# Altium PCB PCB1.PcbDoc (part 2 of 3)
Units mm, origin at the board's own origin, x right, y up, seen from the top; angles counter-clockwise.
Board outline 200 x 55 mm, 4 copper layers (Top Layer, Layer 1, Layer 2, Bottom Layer), stack 1.714 mm thick; 312 components, 230 nets, 1114 pads, 714 vias.
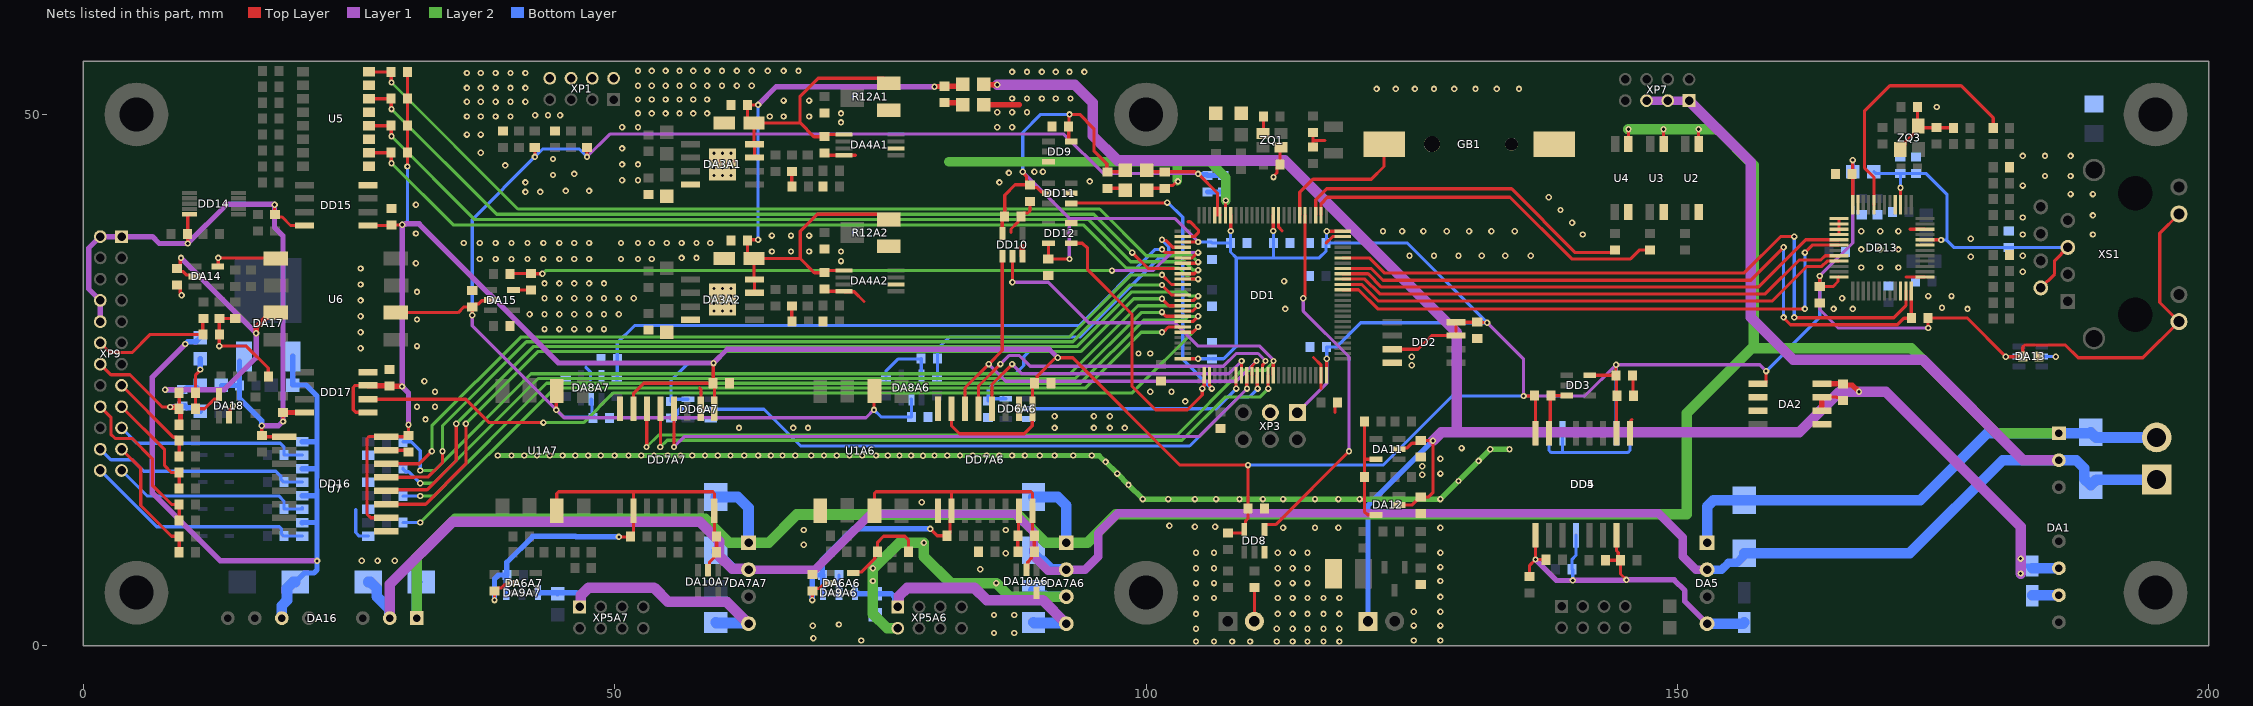
[diagram p4: the nets of this part, all layers, seen from the top]

## Via types
v1: diameter 0.6, hole 0.3, Top Layer to Bottom Layer, tented both sides, 714 vias

## Nets (pads, with @x,y where several pads share a name; then routed paths per layer and width w, separated by ;. In a path a pad name is that pad's centre, name@x,y a point inside that pad or via, vN(x,y) a via of type N, cw(c..) or ccw(c..) an arc to the next point about the centre after c; other vN are vias at no path point) (continued)
+3.3V: C5.1 C6.1 C8.2 C9.2 C10.2 C15.1 C16.1 C22.1 C31.1 C33.1 C34.1 C38A6.1 C38A7.1 C40A6.1 C40A7.1 C56.1 C57.1 C58.1 C59.1 C60.1 C63.1 C68.1 C73.1 C85.1 C86.1 C89.1 DA2.1 DA13.5 DD1.11 DD1.19 DD1.28 DD1.50 DD1.75 DD1.100 DD2.3 DD2.7 DD2.8 DD3.5 DD4.10 DD4.16 DD5.7 DD6A6.5 DD6A7.5 DD7A6.1 DD7A6.7 DD7A7.1 DD7A7.7 DD8.5 DD9.5 DD10.5 DD11.5 DD12.5 DD13.24 DD13.36 DD15.1 DD16.10 DD16.16 DD17.1 DD17.3 L2.1 L5.1 R40.2 R55.2 R76.1 R78.1 R79.1 R80.1 XP3.1 XS1.9 XS1.11 | length 529.1
  Top Layer w0.3: DD17.1@26.8,21.95 26.776,21.974 25.626,21.974 25.4,22.2 25.4,24.3 25.6,24.5 DD17.3@26.8,24.5 DD17.3@26.825,24.475 ; DD15.1@26.8,39.544 28.944,39.544 C85.1@29,39.6 v1@30.005,39.6 ; DD16.16@28.485,19.685 26.876,19.685 26.7,19.509 26.7,12.39 27.04,12.05 DD16.10@28.5,12.05 ; DD16.16@28.5,19.67 30.47,19.67 C86.1@30.6,19.8 v1(30.6,20.8) ; C89.1@28.775,24.475 C89.1@28.8,24.45 ; v1(30.5,45.1) R80.1@30.5,46.4 R78.1@30.5,51.5 R76.1@30.5,54 ; DD7A7.7@51.77,22.3 51.785,22.315 51.785,23.75 52.735,24.7 C40A7.1@59.25,24.7 59.275,24.725 59.275,26.575 v1(59.3,26.6) ; DD7A7.1@59.39,22.3 C40A7.1@59.39,24.54 ; DD7A6.7@81.701,22.3 81.701,20.699 82.45,19.95 88.55,19.95 89.3,20.7 89.3,22.329 89.321,22.35 89.321,24.521 C40A6.1@89.5,24.7 ; DD10.5@86.481,38.802 86.481,40.213 C58.1@86.668,40.4 86.7,40.432 86.7,42.4 87.675,43.375 C59.1@89.025,43.375 ; v1(88.4,44.6) 88.4,44.519 88.75,44.169 88.75,43.65 C59.1@89.025,43.375 ; C40A6.1@89.55,24.8 89.766,25.016 89.766,25.371 91.438,27.043 91.643,27.043 v1(91.7,27.1) 93.1,27.1 103.2,17 v1(109.6,17) C56.1@109.6,12.9 109.6,11.975 109.375,11.75 109.375,11.075 DD8.5@109.25,10.95 109.25,10.725 109.125,10.6 R40.2@107.7,10.6 ; C60.1@90.8,36.4 C60.1@90.824,36.4 ; C60.1@90.824,36.374 C60.1@90.824,36.4 ; DD12.5@90.824,37.883 C60.1@90.824,36.4 ; DD11.5@90.825,42.578 90.7,42.703 90.15,42.703 89.745,43.108 89.342,43.108 C59.1@89.075,43.375 C59.1@89.025,43.375 ; C57.1@92.725,48.925 C57.1@92.725,48.875 ; v1(92.8,36.4) C60.1@90.824,36.4 ; DD9.5@92.975,47.45 92.85,47.45 92.725,47.575 C57.1@92.725,48.875 ; L2.1@98.065,44.75 97.915,44.6 C5.1@96.365,44.6 96.315,44.6 96.315,45.362 95.1,46.577 95.1,48.669 93.769,50 v1(92.8,50) 92.762,49.962 92.762,48.913 C57.1@92.725,48.875 ; DD1.50@103.45,27 v1(104.9,27) ; DD1.28@103.45,38 v1(104.9,38) ; v1(107.975,39.025) DD1.19@107.975,40.525 ; v1(111.975,39.025) DD1.11@111.975,40.525 ; DD1.75@116.975,25.475 116.975,26.975 v1(117,27) ; v1(117,39) DD1.100@118.5,39 ; DD2.3@123.171,27.896 125.596,27.896 126.896,29.196 DD2.7@129.171,29.196 DD2.8@129.171,30.446 C22.1@131.171,30.446 131.193,30.423 132.077,30.423 v1(132.1,30.4) ; v1(135.533,23.5) 136.5,23.5 C31.1@136.55,23.55 136.65,23.45 DD4.16@136.65,20.01 ; DD3.5@141.75,25.45 C34.1@144.235,25.45 ; v1(144.24,26.445) 144.237,26.442 144.237,25.448 144.272,25.413 144.272,23.564 C33.1@144.308,23.527 144.27,23.489 DD4.10@144.27,20.01 ; DA2.1@157.6,24.65 158.2,24.65 158.35,24.8 v1(158.35,25.85) ; v1(163.4,34.8) C73.1@163.4,33.8 164.644,33.8 165.12,34.276 165.12,34.7 DD13.36@165.2,34.7 ; DD13.24@166.5,41.5 166.5,44.35 C68.1@166.45,44.4 166.475,44.425 166.475,45.675 v1(166.5,45.7) ; v1(173.6,29.9) 173.585,29.915 173.585,30.835 R55.2@173.57,30.85 177.25,30.85 v1(180.9,27.2) 182.475,27.2 C63.1@182.5,27.225 182.5,28.124 182.676,28.3 186.512,28.3 187.712,27.1 193.8,27.1 XS1.9@197.2,30.5 195.4,32.3 195.4,38.83 XS1.11@197.2,40.63
  Top Layer w0.5: DD17.3@26.825,24.475 C89.1@28.775,24.475 ; C89.1@28.825,24.425 28.831,24.419 29.981,24.419 v1(30,24.4)
  Layer 1 w0.3: v1(88.4,44.6) 92.787,40.213 ; v1@92.787,36.413 92.787,40.213 ; v1(104.9,38) 102.687,40.213 92.787,40.213 ; XP3.1@114.24,21.94 117,24.7 v1(117,27) ; v1(132.1,30.4) 135.533,26.967 v1(135.533,23.5) 141.295,23.5 v1(144.24,26.445) 157.755,26.445 v1(158.35,25.85) ; v1(166.5,45.7) 166.5,37.9 v1(163.4,34.8) 163.4,31.644 165.144,29.9 v1(173.6,29.9)
  Layer 1 w0.5: v1(30.6,20.8) 30.6,23.8 v1(30,24.4) 30.009,24.409 30.009,39.631 30.048,39.67 30.287,39.67 30.317,39.7 31.6,39.7 44.7,26.6 v1(59.3,26.6) 60.6,27.9 90.9,27.9 v1(91.7,27.1)
  Bottom Layer w0.3: v1(30.017,39.612) 30.099,39.612 30.249,39.762 30.324,39.762 30.5,39.938 v1(30.5,45.1) ; C38A7.1@55.3,23 55.3,24.976 56.924,26.6 v1(59.3,26.6) ; C38A7.1@55.5,23.2 DD6A7.5@56.9,23.2 ; DD6A6.5@86.547,23.373 DD6A6.5@86.672,23.248 ; DD6A6.5@86.801,23.248 DD6A6.5@86.672,23.248 ; v1(88.4,44.6) 88.4,48.3 90.1,50 v1(92.8,50) ; v1(91.7,27.1) 90.9,27.9 89.2,27.9 88.5,27.2 88.5,26.371 87.741,25.612 86.642,25.612 85.151,24.121 C38A6.1@85.151,23.048 85.273,23.171 85.291,23.171 85.369,23.248 DD6A6.5@86.672,23.248 ; v1(104.9,27) C10.2@106,27 ; v1(104.9,38) 106.1,38 C9.2@106.2,37.9 C6.1@107.95,37.9 ; C10.2@106.2,27 107.3,27 108.5,28.2 108.5,36.5 ; v1(107.975,39.025) 107.962,39.013 107.962,37.912 C6.1@107.95,37.9 ; v1(109.6,17) 122.3,17 128.8,23.5 v1(135.533,23.5) ; v1(111.975,39.025) 111.987,39.013 C8.2@111.987,37.837 ; C8.2@112,37.9 112,36.5 ; v1(117,27) C16.1@117,28.1 117.895,28.1 120.195,30.4 v1(132.1,30.4) 124.6,37.9 C15.1@116.95,37.9 ; v1(117,39) 116.975,38.975 116.975,37.925 C15.1@116.95,37.9 ; v1(144.24,26.445) 144.255,26.429 144.255,20.025 DD5.7@144.27,20.01 ; v1(158.35,25.85) 163.4,30.9 v1(163.4,34.8) ; L5.1@166.5,44.6 v1(166.5,45.7) ; v1(180.9,27.2) 180.912,27.212 182.137,27.212 DA13.5@182.15,27.225 ; C6.1@107.95,37.9 107.95,37.05 108.5,36.5 ; 108.5,36.5 112,36.5 ; 112,36.5 116.3,36.5 116.95,37.15 C15.1@116.95,37.9
+3.3VA: C7.2 C11.1 C13.2 C47A6.1 C47A7.1 C87.1 DA8A6.2 DA8A7.2 DA15.2 DD1.21 DD1.22 L2.2 R15A3.1 R15A4.1 U1A6.6 U1A7.6 U6.6 | length 165.3
  Top Layer w0.3: U6.6@29.399,31.35 35.271,31.35 35.8,31.879 C87.1@36.6,31.879 ; v1(36.6,31.1) C87.1@36.6,31.879 ; DA15.2@38.324,32.529 38.26,32.465 37.477,32.465 37.166,32.154 36.875,32.154 C87.1@36.6,31.879 ; R15A4.1@42.485,46.875 42.5,46.86 v1(42.5,46) ; v1(44.5,22.2) 44.5,23.925 U1A7.6@44.55,23.975 ; R15A3.1@47.385,46.875 47.4,46.86 v1(47.4,46) ; v1(74.4,22.2) 74.4,23.934 U1A6.6@74.441,23.975 ; L2.2@100.065,44.75 100.215,44.6 C11.1@101.765,44.6 104.619,44.6 104.819,44.4 v1(104.9,44.4) 106.725,42.575 106.725,40.525 ; DD1.22@106.475,40.525 106.725,40.525 ; DD1.21@106.975,40.525 106.725,40.525
  Layer 1 w0.3: v1(36.6,31.1) 36.6,30.1 45.25,21.45 73.65,21.45 v1(74.4,22.2) ; v1(47.4,46) 49.55,48.15 92.271,48.15 95.969,44.452 104.848,44.452 v1(104.9,44.4)
  Bottom Layer w0.3: v1(36.6,31.1) 36.6,40.1 v1(42.5,46) 43.258,46.758 46.642,46.758 v1(47.4,46) ; v1(44.5,22.2) 45.2,21.5 48.125,21.5 C47A7.1@48.079,21.555 ; DA8A7.2@47.8,22.75 DA8A7.2@47.8,23.195 ; DA8A7.2@47.8,23.2 47.877,23.123 47.877,21.527 C47A7.1@47.954,21.45 ; v1(74.4,22.2) 75.069,21.531 77.923,21.531 77.923,23.22 DA8A6.2@77.918,23.225
  Bottom Layer w0.5: v1(104.9,44.4) 104.957,44.343 105.707,44.343 C13.2@105.8,44.25 105.804,44.254 107.262,44.254 C7.2@107.266,44.258
+3.3VA_ETH: C61.1 C72.1 C75.1 DD13.8 DD13.15 L5.2 XS1.2 XS1.5 | length 33.6
  Top Layer w0.3: DD13.15@171,41.5 v1(171,43.1) ; DD13.8@173.3,38.2 174.797,38.2 v1(174.816,38.182) ; XS1.2@184.2,33.677 185.5,34.977 185.5,36.247 XS1.5@186.74,37.487
  Bottom Layer w0.3: L5.2@168.5,44.6 168.65,44.45 C72.1@170.975,44.45 ; v1(171,43.1) 171,44.425 C72.1@170.975,44.45 ; v1(174.816,38.182) 175.382,38.182 ; XS1.5@186.74,37.487 C61.1@181.179,37.487 176.013,37.487 175.382,38.118 175.382,42.433 173.365,44.45 C75.1@172.442,44.45 C72.1@170.975,44.45
+5V: C2.1 C4.1 C52.1 C53.1 DA1.6 DA2.8 DA11.2 DA12.2 L1.1 XP6.1 | length 173.1
  Top Layer w0.3: L1.1@84.735,52.85 L1.1@84.785,52.8 ; DA11.2@123.8,18.5 123.921,18.621 124.59,18.621 125.019,19.05 125.575,19.05 C52.1@125.85,19.325 125.863,19.312 126.988,19.312 v1(127,19.3) 127,14.4 126.607,14.007 C53.1@125.85,14.007 125.8,14.007 125.05,13.257 124.121,13.257 123.996,13.382 DA12.2@123.871,13.257
  Top Layer w0.5: L1.1@84.785,52.8 v1(86,52.8) ; DA2.8@163.235,24.65 DA2.8@163.6,24.65 C4.1@165.6,24.65 165.709,24.541 166.452,24.541 v1@167.074,23.919
  Layer 1 w1: v1(86,52.8) 93.3,52.8 95,51.1 95,48 97.342,45.658 113.042,45.658 129.225,29.475 129.225,20.1 ; v1(127,19.3) 127.8,20.1 129.225,20.1 ; v1(182.3,6.8) v1(182.3,8.2) 182.3,11.2 169.6,23.9 v1(167.093,23.9) 165.265,23.9 161.465,20.1 129.225,20.1
  Bottom Layer w0.5: XP6.1@120.896,2.3 120.896,13.196 v1(127,19.3) ; v1(182.3,6.8) 182.3,7.5 ; v1(182.3,8.2) 182.3,7.5 ; C2.1@183.4,7.5 182.3,7.5
  Bottom Layer w1: C2.1@183.4,7.3 DA1.6@185.9,7.3
+5V_DRVA6: C41A6.1 C44A6.1 C48A6.1 C49A6.1 DA6A6.2 DA9A6.1 DA10A6.2 DD7A6.10 DD7A6.16 R25A6.2 U1A6.3 | length 50.9
  Top Layer w0.3: v1(68.6,4.3) C41A6.1@68.6,5.15 68.854,5.404 69.282,5.404 69.653,5.775 70.175,5.775 DA6A6.2@70.3,5.9 ; U1A6.3@74.441,12.75 74.441,14.324 74.616,14.5 81.701,14.5 ; v1(79.7,11) 80.35,10.35 R25A6.2@81.291,10.35 81.551,10.61 81.551,12.6 81.701,12.75 81.701,14.5 ; DA10A6.2@88.741,7.15 88.866,7.275 88.866,7.875 89.216,8.225 89.216,8.575 C48A6.1@89.491,8.85 C44A6.1@89.491,10.35 89.321,10.52 89.321,12.75 89.326,12.755 89.326,14.324 89.151,14.5 81.701,14.5
  Bottom Layer w0.5: v1(68.6,4.3) 68.6,6.491 68.776,6.667 C49A6.1@69.55,6.667 ; DA9A6.1@69.6,5 69.575,5.025 69.575,6.642 C49A6.1@69.55,6.667 ; v1(79.7,11) 72.441,11 69.55,8.109 C49A6.1@69.55,6.667
+5V_DRVA7: C41A7.1 C44A7.1 C48A7.1 C49A7.1 DA6A7.2 DA9A7.1 DA10A7.2 DD7A7.10 DD7A7.16 R25A7.2 U1A7.3 | length 50.3
  Top Layer w0.3: v1(38.7,4.3) C41A7.1@38.7,5.15 38.975,5.425 39.34,5.425 39.69,5.775 40.291,5.775 DA6A7.2@40.416,5.9 ; U1A7.3@44.55,12.7 44.55,14.324 44.726,14.5 51.77,14.5 ; v1(50.4,10.25) 51.45,10.25 51.77,10.57 DD7A7.10@51.77,12.7 51.77,14.5 ; DA10A7.2@58.8,7.1 58.925,7.225 58.925,7.863 59.325,8.263 59.325,8.525 C48A7.1@59.6,8.8 C44A7.1@59.6,10.3 59.4,10.5 59.4,14.324 59.224,14.5 51.77,14.5
  Bottom Layer w0.5: v1(38.7,4.3) 38.7,6.3 39.067,6.667 C49A7.1@39.858,6.667 ; DA9A7.1@39.8,5 39.8,6.609 C49A7.1@39.858,6.667 ; v1(50.4,10.25) 46.361,10.25 46.311,10.3 42.3,10.3 39.858,7.858 C49A7.1@39.858,6.667
+5V_HW: C78.1 C83.1 C84.1 C92.1 C94.1 DA17.3 DD14.10 DD15.8 DD16.1 DD17.8 L7.1 XP9.1 XP9.2 XP9.8 XP9.10 | length 71.1
  Top Layer w0.3: v1(9.825,37.85) C78.1@9.825,38.75 9.825,40.55 DD14.10@10.025,40.55 ; C84.1@16.8,19.8 v1(16.8,20.7) ; C84.1@17.1,19.695 17.125,19.67 DD16.1@18.8,19.67 ; v1(18,41.5) 18,40.625 C83.1@18.025,40.6 18.281,40.344 18.705,40.344 19.499,39.55 DD15.8@20.8,39.55 ; v1(18.8,21.1) C92.1@18.8,21.95
  Top Layer w0.5: C92.1@18.8,21.95 DD17.8@20.8,21.95
  Layer 1 w0.5: XP9.10@1.6,30.5 XP9.8@1.6,32.5 0.518,33.582 0.518,37.418 XP9.2@1.6,38.5 XP9.1@3.6,38.5 6.5,38.5 7.15,37.85 v1(9.825,37.85) 13.525,41.55 17.95,41.55 v1(18,41.5) 18,39.375 18.8,38.575 v1(18.8,21.1) 18.773,21.1 18.373,20.7 v1(16.8,20.7)
  Bottom Layer w0.5: L7.1@13,24.5 C94.1@14.7,24.5 ; DA17.3@14.7,26.804 C94.1@14.7,24.5 ; v1@16.767,20.733 16.781,20.746 16.781,21.194 14.7,23.275 C94.1@14.7,24.5
+5V_PS: C35.1 C36.1 C37.1 DA5.4 DD4.1 DD4.7 DD5.13 R17.1 R19.1 R20.1 | length 38.4
  Top Layer w0.3: R19.1@136.1,6.5 136.1,7.568 v1(136.65,8.118) ; DD4.1@136.65,10.41 v1(136.65,8.118) ; R17.1@137.64,8.098 137.62,8.118 v1(136.65,8.118) ; R20.1@143.247,8.05 C35.1@144.65,8.05 ; DD4.7@144.27,10.41 144.27,8.932 144.433,8.769 144.433,8.267 C35.1@144.65,8.05 ; v1(145.2,6.2) 144.65,6.75 C35.1@144.65,8.05
  Layer 1 w0.5: v1(136.65,8.118) 138.618,6.15 v1(140.15,6.15) 140.175,6.175 145.175,6.175 v1(145.2,6.2) 149.7,6.2 150.7,5.2 150.7,4.18 DA5.4@152.8,2.08
  Bottom Layer w0.3: v1(140.15,6.15) 140.15,7.15 C36.1@140.1,7.2 140.1,8.15 140.46,8.51 DD5.13@140.46,10.41
  Bottom Layer w1: DA5.4@152.8,2.08 156.18,2.08 C37.1@156.3,2.2
+5VA: C3.1 C25A1.1 C25A2.1 C26A1.1 C26A2.1 C29A1.1 C29A2.1 DA3A1.7 DA3A1.8 DA3A2.7 DA3A2.8 DA4A1.1 DA4A2.1 L1.2 R12A1.3 R12A2.3 | length 87.1
  Top Layer w0.3: DA3A2.7@63.149,33.216 DA3A2.8@63.149,34.466 63.124,34.491 C26A2.1@63.124,36.441 ; DA3A1.7@63.15,45.95 DA3A1.8@63.15,47.2 63.125,47.225 C26A1.1@63.125,49.2 ; v1(63.5,38.2) 62.546,38.2 C25A2.1@62.499,38.153 62.499,36.891 62.949,36.441 C26A2.1@63.124,36.441 ; v1(63.5,50.9) C25A1.1@62.5,50.9 62.5,49.65 62.95,49.2 C26A1.1@63.125,49.2 ; C29A2.1@69.749,35.103 68.799,35.103 67.461,36.441 ; C29A1.1@69.75,47.85 70,48.1 DA4A1.1@71.574,48.1 ; C29A1.1@69.75,47.9 68.75,47.9 67.45,49.2 ; C29A2.1@69.772,35.08 69.998,35.306 DA4A2.1@71.573,35.306 ; R12A2.3@75.797,40.125 75.322,40.6 69.047,40.6 67.461,39.014 67.461,36.441 ; R12A1.3@75.797,52.925 75.322,53.4 69.147,53.4 67.45,51.703 67.45,49.2 ; v1(80.1,52.6) v1@80.125,52.625 ; C3.1@81.01,52.625 C3.1@81.035,52.65 ; L1.2@82.535,52.65 L1.2@82.735,52.85 ; C26A2.1@63.124,36.441 67.461,36.441 ; C26A1.1@63.125,49.2 67.45,49.2
  Top Layer w0.5: v1@80.125,52.625 C3.1@81.01,52.625 ; C3.1@81.035,52.65 L1.2@82.535,52.65
  Layer 1 w0.5: v1(63.5,50.9) 65.2,52.6 v1(80.1,52.6)
  Bottom Layer w0.3: v1(63.5,38.2) v1(63.5,50.9)
+5VA_HW: C80.1 C98.1 DA14.2 L7.2 U6.3 | length 31.5
  Top Layer w0.3: v1(9.2,36.5) 9.2,36.419 9.125,36.344 9.125,35.775 8.85,35.5 C80.1@8.8,35.5 9.075,35.225 9.377,35.225 9.727,34.875 10.377,34.875 DA14.2@10.502,34.75
  Top Layer w0.5: v1(16.267,29.41) 16.286,29.429 16.286,30.012 17.224,30.95 17.724,30.95 U6.3@18.124,31.35
  Layer 1 w0.5: v1(7.7,24.1) 13.262,24.1 16.267,27.105 16.267,29.422 9.2,36.488 v1(9.2,36.5)
  Bottom Layer w0.5: v1(7.7,24.1) 7.703,24.097 9.312,24.097 C98.1@9.315,24.095 ; C98.1@9.399,23.92 9.773,24.294 10.68,24.294 L7.2@10.784,24.19
+12V_DRVA6: C43A6.1 C45A6.2 DA7A6.4 DA9A6.3 XP5A6.1 | length 26.7
  Layer 1 w1: XP5A6.1@76.641,3.65 76.741,3.75 76.741,4.658 77.523,5.441 83.859,5.441 85,4.3 90.28,4.3 DA7A6.4@92.5,2.08
  Bottom Layer w0.5: DA9A6.3@72.6,5 72.6,4.943 72.635,4.908 C45A6.2@74.5,4.908 ; C45A6.2@74.508,4.9 76.045,4.9 76.337,4.607 76.337,3.953 XP5A6.1@76.641,3.65
  Bottom Layer w1: C43A6.1@89.41,2.2 89.47,2.14 92.44,2.14 DA7A6.4@92.5,2.08
+12V_DRVA7: C43A7.1 C45A7.2 DA7A7.4 DA9A7.3 XP5A7.1 | length 26.9
  Layer 1 w1: XP5A7.1@46.7,3.65 46.8,3.75 46.8,4.725 47.552,5.477 53.697,5.477 55.024,4.15 60.53,4.15 DA7A7.4@62.6,2.08
  Bottom Layer w0.5: DA9A7.3@42.8,5 44.525,5 C45A7.2@44.625,4.9 ; C45A7.2@44.625,5 46.407,5 46.7,4.707 XP5A7.1@46.7,3.65
  Bottom Layer w1: C43A7.1@59.5,2.2 59.56,2.14 62.54,2.14 DA7A7.4@62.6,2.08
+24V: C1.1 C32.1 C39A6.1 C39A7.1 C90.1 DA1.2 DA5.2 DA7A6.2 DA7A7.2 DA16.2 XP2.1 XP7.1 XP7.3 XP7.5 | length 266.9
  Layer 1 w0.8: DA7A7.2@62.6,7.16 68.86,7.16 74.129,12.429 87.689,12.429 89.458,10.659 89.458,8.377 90.757,7.079 92.419,7.079 DA7A6.2@92.5,7.16 94.26,7.16 95.5,8.4 95.5,10.6 97.37,12.47 148.23,12.47 150.5,10.2 150.5,8.4 151.726,7.174 152.786,7.174 DA5.2@152.8,7.16 ; XP7.5@147.1,51.3 XP7.3@149.1,51.3 XP7.1@151.1,51.3
  Layer 1 w1: DA16.2@28.84,2.6 28.84,5.784 34.741,11.685 58,11.685 59.85,9.835 59.85,8.45 61.063,7.237 62.523,7.237 DA7A7.2@62.6,7.16 ; XP7.1@151.1,51.3 156.9,45.5 156.9,30.9 160.9,26.9 173.109,26.9 182.549,17.46 DA1.2@185.9,17.46
  Bottom Layer w0.8: C39A7.1@59.5,9 59.5,8.8 60.2,8.1 60.4,8.1 61.225,7.275 62.485,7.275 DA7A7.2@62.6,7.16 ; C39A6.1@89.41,9 89.41,8.8 90.11,8.1 90.31,8.1 91.136,7.275 92.385,7.275 DA7A6.2@92.5,7.16 ; DA5.2@152.8,7.16 154.16,7.16 154.8,7.8 155.6,7.8 156.3,8.5 C32.1@156.3,8.7
  Bottom Layer w1: C90.1@26.8,6 27,6 27.6,5.4 27.6,4.642 28.783,3.459 28.783,2.657 DA16.2@28.84,2.6 ; C32.1@156.3,8.7 171.85,8.7 180.61,17.46 187.54,17.46 188.3,16.7 188.3,15.7 C1.1@188.9,15.1 189.44,15.64 XP2.1@195.1,15.64
+24V_HW: C91.2 C93.1 DA16.6 DA17.1 L6.1 U7.10 U7.12 U7.14 U7.16 | length 69.1
  Layer 1 w0.5: v1(9.6,28.4) 6.5,25.3 6.5,14.391 12.903,7.988 v1(22,7.988)
  Bottom Layer w0.5: v1(9.6,28.4) 9.627,28.4 9.842,28.615 10.621,28.615 L6.1@11.006,29 ; DA17.1@19.7,27.229 C91.2@19.7,24.535 20.956,24.535 22,23.492 22,19.21 ; C93.1@19.959,6 20.804,6.845 21.707,6.845 22,7.138 v1(22,7.988) 22,11.595 ; U7.10@20.6,11.59 20.605,11.595 22,11.595 ; U7.12@20.6,14.13 21.994,14.13 22,14.124 ; U7.14@20.6,16.67 21.921,16.67 22,16.591 ; U7.16@20.6,19.21 22,19.21 ; 22,11.595 22,14.124 ; 22,14.124 22,16.591 ; 22,16.591 22,19.21
  Bottom Layer w1: DA16.6@18.68,2.6 18.68,3.78 19.169,4.269 19.169,5.4 19.769,6 C93.1@19.959,6
+24VA_HW: C96.1 C97.1 DA18.5 L6.2 | length 7.9
  Top Layer w0.3: C97.1@10.574,23.807 10.574,25.493 11,25.919 v1(11,26) ; C97.1@10.574,23.864 C96.1@10.575,22.3 C96.1@10.575,22.3 11.408,22.3 12.308,23.2 12.633,23.2 12.758,23.325 DA18.5@12.758,23.65
  Bottom Layer w0.5: v1(11,26) 11.003,26.003 11.003,26.997 L6.2@11.006,27
+VBAT: DD1.6 GB1.2 | length 13.2
  Top Layer w0.3: DD1.6@114.475,40.525 114.475,42.675 115.7,43.9 121.2,43.9 122.4,45.1 GB1.2@122.4,47.2
ACTn: DD13.20 R47.2 | length 24.5
  Top Layer w0.3: DD13.20@168.5,41.5 168.5,44.1 167.6,45 167.6,50.3 170,52.7 176.7,52.7 179.725,49.675 R47.2@179.725,48.712
AGND: C3.2 C7.1 C11.2 C13.1 C23A1.1 C23A2.1 C25A1.2 C25A2.2 C26A1.2 C26A2.2 C27A1.2 C27A2.2 C28A1.2 C28A2.2 C29A1.2 C29A2.2 C30A3.2 C30A4.2 C47A6.2 C47A7.2 C50A6.2 C50A7.2 C87.2 C88.2 DA3A1.4 DA3A1.EPAD DA3A2.4 DA3A2.EPAD DA4A1.4 DA4A1.6 DA4A2.4 DA4A2.6 DA8A6.5 DA8A7.5 DA15.5 DD1.20 R1.2 R2.2 R7A1.2 R7A2.2 R11A1.1 R11A2.1 R12A1.1 R12A2.1 R13A1.2 R13A2.2 R27A6.2 R27A7.2 R81.2 XP1.2 XP1.4 XP1.6 XP1.8 | length 58.8
  Top Layer w0.3: DA15.5@40.474,33.479 C88.2@42.124,33.479 ; R13A2.2@66.673,30.531 C27A2.2@66.673,31.981 ; R13A1.2@66.674,43.2 C27A1.2@66.674,44.65 ; C29A2.2@69.673,33.431 69.748,33.356 DA4A2.4@71.573,33.356 71.623,33.306 72.551,33.306 73.462,32.394 ; C29A1.2@69.75,46.3 69.9,46.15 DA4A1.4@71.574,46.15 72.65,46.15 ; R1.2@82.535,51.1 R1.2@82.735,50.9 ; R2.2@100.065,42.85 100.265,43.05 C11.2@101.765,43.05 102.04,43.325 102.544,43.325 102.919,43.7 v1(103,43.7) ; DD1.20@107.475,40.525 107.475,41.875 v1(107.5,41.9)
  Top Layer w0.5: C3.2@81.035,51.1 R1.2@82.535,51.1
  Layer 2 w0.9: 81.443,45.535 102.961,45.535 ; v1@102.961,43.739 102.961,45.535 ; v1(107.5,41.9) 107.5,44.09 106.054,45.535 102.961,45.535
  Bottom Layer w0.3: 47.3,26.2 47.72,25.78 47.72,25 ; R27A6.2@75.527,25.076 75.527,25.847 76.657,26.976 78.777,26.976 C50A6.2@78.827,27.026 78.848,27.006 78.848,25.395 DA8A6.5@78.868,25.375
  Bottom Layer w0.5: C13.1@105.8,42.7 105.804,42.704 107.262,42.704 C7.1@107.266,42.708 107.306,42.708 107.481,42.533 107.481,41.918 v1@107.499,41.9
  other v1: 43.4,29.8 44.8,29.8 46.2,29.8 47.6,29.8 49,29.8 42,31.2 43.4,31.2 44.8,31.2 46.2,31.2 47.6,31.2 49,31.2 50.4,31.2 59.349,31.516 60.149,31.516 60.949,31.516 59.349,32.216 60.149,32.216 60.949,32.216 43.4,32.7 44.8,32.7 46.2,32.7 47.6,32.7 49,32.7 50.4,32.7 51.8,32.7 59.349,32.916 60.149,32.916 60.949,32.916 59.349,33.616 60.149,33.616 60.949,33.616 43.4,34.1 44.8,34.1 46.2,34.1 47.6,34.1 49,34.1 71.3,36.2 37.3,36.4 38.8,36.4 40.3,36.4 41.8,36.4 43.3,36.4 44.8,36.4 46.2,36.4 47.6,36.4 50.6,36.4 52.2,36.4 53.5,36.4 56.3,36.5 57.7,36.5 64.8,37.1 66.6,37.1 68.3,37.1 71.3,37.1 35.8,37.9 37.3,37.9 38.8,37.9 40.3,37.9 41.8,37.9 43.3,37.9 44.8,37.9 46.2,37.9 47.6,37.9 50.6,37.9 52.2,37.9 53.5,37.9 54.9,37.9 56.3,37.9 57.7,37.9 59,37.9 64.8,38.6 66.6,38.6 68.3,38.6 41.6,42.714 43,42.714 45.4,42.8 47.6,42.8 41.6,43.6 50.7,43.8 52.2,43.8 59.35,44.25 60.15,44.25 60.95,44.25 44.2,44.3 46.2,44.4 59.35,44.95 60.15,44.95 60.95,44.95 39.7,45.2 50.7,45.3 52.2,45.3 59.35,45.65 60.15,45.65 60.95,45.65 44.2,45.8 59.35,46.35 60.15,46.35 60.95,46.35 37.4,46.4 50.7,46.8 36.1,48.1 37.4,48.1 50.7,48.8 52.2,48.8 71.3,49.25 36.1,49.8 37.4,49.8 38.8,49.8 40.2,49.8 64.6,49.8 65.9,49.8 68.3,49.8 42.52,49.925 43.729,49.925 44.873,49.925 52.2,50.1 53.5,50.1 54.8,50.1 56.1,50.1 57.4,50.1 58.7,50.1 71.3,50.1 36.1,51.2 37.4,51.2 38.8,51.2 40.2,51.2 41.6,51.2 65.9,51.3 68.3,51.3 52.2,51.4 53.5,51.4 54.8,51.4 56.1,51.4 57.4,51.4 58.7,51.4 36.1,52.5 37.4,52.5 38.8,52.5 40.2,52.5 41.6,52.5 52.2,52.7 53.5,52.7 54.8,52.7 56.1,52.7 57.4,52.7 58.7,52.7 60.1,52.7 61.5,52.7 62.9,52.7 36.1,53.9 37.4,53.9 38.8,53.9 40.2,53.9 41.6,53.9 52.2,54.1 53.5,54.1 54.8,54.1 56.1,54.1 57.4,54.1 58.7,54.1 60.1,54.1 61.5,54.1 62.9,54.1 64.4,54.1 65.9,54.1 67.3,54.1
AGND_HW: C80.2 C95.2 C96.2 C97.2 C98.2 DA14.5 DA18.2 R58.2 R65.2 R77.2 R88.2 R89.1 U6.1 XP9.14 | length 34.2
  Top Layer w0.3: XP9.14@1.6,26.5 2.6,25.5 4.4,25.5 7.432,22.468 v1(8.189,22.468) ; C80.2@8.8,33.95 8.85,33.95 9.125,33.675 9.125,33.196 9.25,33.071 v1(9.25,32.99) ; C97.2@9.023,23.865 9.024,23.864 C96.2@9.025,22.3 C96.2@9.025,22.3 ; DA14.5@12.652,35.7 12.7,35.748 v1(12.7,36.5) 18.074,36.5 U6.1@18.124,36.45 ; R58.2@12.8,29.3 v1(12.8,28.2) 15.349,28.2 17.408,26.141 R89.1@17.408,25.345 ; R58.2@12.8,29.525 R65.2@12.8,30.8 R77.2@14.3,30.8 ; DA18.2@13.708,21.5 13.833,21.625 13.833,22.251 14.085,22.503 v1(14.085,22.584)
  Top Layer w0.5: v1(8.189,22.468) 8.208,22.449 9.051,22.449 C96.2@9.106,22.394 ; C95.2@8.998,20.802 C95.2@9,20.8 ; C96.2@9.15,22.3 9.152,22.298 C95.2@9.152,20.79
  Bottom Layer w0.5: v1(8.189,22.468) 8.216,22.468 8.261,22.513 9.09,22.513 9.169,22.591 9.576,22.591 9.773,22.394 10.656,22.394 R88.2@11,22.05
AN_MOD_HW: R58.1 R61.1 XP9.12 | length 12.2
  Top Layer w0.3: XP9.12@1.6,28.5 2.5,27.6 3.973,27.6 4.6,27.6 6.3,29.3 R58.1@11.25,29.3 11.25,30.75 R61.1@11.3,30.8
COM1_HW: R60.2 R67.1 XP9.17 | length 10.4
  Top Layer w0.3: XP9.17@3.6,22.5 7.648,18.452 7.648,16.952 8.3,16.3 R60.2@9.025,16.3 R67.1@9.025,14.8
COM2_HW: R63.2 R74.1 XP9.18 | length 15.1
  Top Layer w0.3: XP9.18@1.6,22.5 2.6,21.5 2.6,19.9 3,19.5 4.6,19.5 6.5,17.6 6.5,15.1 8.3,13.3 R63.2@9.025,13.3 R74.1@9.025,11.8
COM3_HW: R66.2 R68.1 XP9.21 | length 12.4
  Top Layer w0.3: XP9.21@3.6,18.5 5.4,16.7 5.4,13.2 8.3,10.3 R66.2@9.025,10.3 9.025,10.152 R68.1@9.025,8.8
CRASH_IND: DD1.3 R38.2 | length 32.6
  Top Layer w0.3: DD1.3@115.975,40.525 115.975,41.975 117,43 134.4,43 140.4,37 143.875,37 R38.2@144.125,37.25
D_VALUE: DD1.52 DD12.1 | length 26.5
  Top Layer w0.3: DD12.1@92.974,37.883 94.017,37.883 94.5,37.4 94.5,35.4 98.686,31.214 98.686,24.414 100.891,22.209 103.909,22.209 105.3,23.6 105.3,24.281 105.475,24.456 DD1.52@105.475,25.475
  other v1: 105.3,24.2
DIG_MOD_HW: R57.2 R73.1 XP9.15 | length 9.1
  Top Layer w0.3: XP9.15@3.6,24.5 8.475,19.625 8.75,19.625 9.025,19.35 R57.2@9.025,19.3 R73.1@9.025,17.8
DRV1_ADC: C50A6.1 DD1.29 R28A6.2 | length 32.2
  Top Layer w0.3: v1(101.5,38.2) 101.557,38.143 101.857,38.143 102.5,37.5 DD1.29@103.45,37.5
  Bottom Layer w0.3: R28A6.2@80.327,25.076 R28A6.2@80.377,25.126 ; R28A6.2@80.377,25.131 C50A6.1@80.377,27.031 ; C50A6.1@80.377,27.026 80.377,27.932 81.495,29.05 93.791,29.05 101.241,36.5 101.734,36.5 102.137,36.902 102.137,37.563 v1(101.5,38.2)
DRV1_AN_MOD: DD1.63 DD7A6.5 | length 33
  Top Layer w0.3: DD7A6.5@84.241,22.3 84.241,24.441 v1(86.3,26.5) ; DD1.63@110.975,25.475 110.975,26.444 111.25,26.719 v1(111.25,26.8)
  Layer 1 w0.3: v1(86.3,26.5) 87.1,27.3 88.1,27.3 89.102,26.298 107.276,26.298 108.477,27.5 110.55,27.5 v1(111.25,26.8)
DRV1_DIG_MOD: DD1.59 DD7A6.4 | length 29.3
  Top Layer w0.3: DD7A6.4@85.511,21.793 85.511,24.611 v1(87.4,26.5) ; DD1.59@108.975,25.475 108.975,26.775 v1(109,26.8)
  Layer 1 w0.3: v1(87.4,26.5) 88.3,25.6 107.8,25.6 v1(109,26.8)
DRV1_ERR: DD1.61 DD7A6.6 DD10.1 | length 44
  Top Layer w0.3: DD7A6.6@82.971,22.3 82.971,24.271 v1(85.2,26.5) 86.481,27.781 DD10.1@86.481,36.652 ; DD1.61@109.975,25.475 109.975,26.324 110.4,26.749 v1(110.4,26.8)
  Layer 1 w0.3: v1(85.2,26.5) 86.8,24.9 108.5,24.9 v1(110.4,26.8)
DRV1_ON: DD1.58 DD6A6.2 | length 21.6
  Top Layer w0.3: DD1.58@108.475,25.475 108.475,24.225 v1(108.5,24.2)
  Bottom Layer w0.3: DD6A6.2@88.951,22.298 89.948,22.298 89.951,22.295 106.595,22.295 v1(108.5,24.2)
DRV2_ADC: C50A7.1 DD1.30 R28A7.2 | length 60.5
  Top Layer w0.3: v1(101.5,37.3) 101.526,37.3 101.826,37 DD1.30@103.45,37
  Bottom Layer w0.3: R28A7.2@50.2,25 50.25,25.05 C50A7.1@50.25,27 50.25,28.5 51.889,30.139 93.717,30.139 100.877,37.3 v1(101.5,37.3)
DRV2_AN_MOD: DD1.64 DD7A7.5 | length 64.4
  Top Layer w0.3: v1(54.3,18.7) 54.305,18.705 54.305,22.295 DD7A7.5@54.31,22.3 ; DD1.64@111.475,25.475 111.475,24.225 v1(111.5,24.2)
  Layer 2 w0.3: v1@54.303,18.703 54.939,19.339 103.391,19.339 107.452,23.4 110.7,23.4 v1(111.5,24.2)
DRV2_DIG_MOD: DD1.60 DD7A7.4 | length 61.1
  Top Layer w0.3: DD7A7.4@55.58,22.3 55.59,22.29 v1(55.59,18.7) ; DD1.60@109.475,25.475 109.475,24.225 v1(109.5,24.2)
  Layer 1 w0.3: v1(55.59,18.7) 55.59,18.71 56.58,19.7 105,19.7 v1(109.5,24.2)
DRV2_ERR: DD1.65 DD7A7.6 DD10.2 | length 97.2
  Top Layer w0.3: v1(53,18.7) 53.02,18.72 53.02,22.28 DD7A7.6@53.04,22.3 ; v1(87.431,34.2) DD10.2@87.431,36.652 ; DD1.65@111.975,25.475 111.975,26.775 v1(112,26.8)
  Layer 1 w0.3: v1(87.431,34.2) 90.8,34.2 94.6,30.4 102.7,30.4 104.9,28.2 110.699,28.2 111.85,27.049 111.85,27.031 112,26.881 v1(112,26.8)
  Layer 2 w0.3: v1(53,18.7) 54.138,19.838 102.938,19.838 109.02,25.92 111.218,25.92 v1@111.85,26.551
DRV2_ON: DD1.62 DD6A7.2 | length 56.4
  Top Layer w0.3: DD1.62@110.475,25.475 110.475,24.225 v1(110.5,24.2)
  Bottom Layer w0.3: DD6A7.2@59.05,22.25 64.05,22.25 67.5,18.8 104.1,18.8 108.7,23.4 109.7,23.4 v1(110.5,24.2)
EMIS_IND: DD1.2 R37.2 | length 35
  Top Layer w0.3: DD1.2@116.475,40.525 116.475,41.607 117.068,42.2 134.256,42.2 140.056,36.4 145.6,36.4 146.45,37.25 R37.2@147.425,37.25
ERR_RESET: DD1.53 DD11.1 | length 29.7
  Top Layer w0.3: DD11.1@92.975,41.628 93.011,41.664 101.964,41.664 v1(102,41.7) ; DD1.53@105.975,25.475 105.975,24.506 106.2,24.281 v1(106.2,24.2)
  Bottom Layer w0.3: v1(102,41.7) 102.071,41.7 103.45,40.321 103.45,26.95 v1(106.2,24.2)
ETH_CS: DD1.92 DD13.29 | length 49.1
  Top Layer w0.3: DD1.92@118.5,35 120.9,35 122.153,33.747 157.611,33.747 162.064,38.2 DD13.29@165.2,38.2
ETH_INT: DD1.95 DD13.47 | length 64.5
  Top Layer w0.3: DD1.95@118.5,36.5 121,36.5 122.411,35.089 156.298,35.089 159.709,38.5 v1(161,38.5) ; v1(161,30.9) 161.034,30.866 170.356,30.866 171.5,32.01 DD13.47@171.5,33.4
  Bottom Layer w0.3: v1(161,30.9) v1(161,38.5)
ETH_MISO: DD1.90 DD13.33 | length 48.9
  Top Layer w0.3: DD1.90@118.5,34 120.3,34 121.861,32.439 158.939,32.439 162.2,35.7 163.605,35.7 164.105,36.2 DD13.33@165.2,36.2
ETH_MOSI: DD1.91 DD13.32 | length 48.8
  Top Layer w0.3: DD1.91@118.5,34.5 119.213,34.5 120.597,34.5 121.989,33.108 158.271,33.108 161.463,36.3 163.498,36.3 163.898,36.7 DD13.32@165.2,36.7
ETH_RST: DD1.93 DD13.48 R55.1 | length 65
  Top Layer w0.3: DD1.93@118.5,35.5 121.2,35.5 122.3,34.4 156.9,34.4 v1(160,37.5) ; v1(160,30.9) 160,30.844 160.644,30.2 170.7,30.2 171.321,30.821 171.992,30.821 R55.1@172.02,30.85 172,30.87 DD13.48@172,33.4
  Bottom Layer w0.3: v1(160,30.9) v1(160,37.5)
ETH_SCLK: DD1.89 DD13.30 | length 53
  Top Layer w0.3: DD1.89@118.5,33.5 120,33.5 121.8,31.7 v1(162,31.7) ; v1(162,37) 162.7,37.7 DD13.30@165.2,37.7
  Bottom Layer w0.3: v1(162,31.7) v1(162,37)
EXT_AN_MOD: C88.1 DD1.31 R82.2 | length 67.3
  Top Layer w0.3: R82.2@40.15,34.979 40.2,35.029 C88.1@42.124,35.029 42.139,35.015 43.185,35.015 v1(43.2,35) ; DD1.31@103.45,36.5 104.339,36.5 104.839,37 v1(104.9,37)
  Layer 1 w0.3: v1(96.8,35.3) 100.663,35.3 102.363,37 v1(104.9,37)
  Layer 2 w0.3: v1(43.2,35) 43.226,35 43.526,35.3 v1(96.8,35.3)
EXT_COM1: DD1.38 DD16.13 | length 84.9
  Top Layer w0.3: DD16.13@28.5,15.86 31.139,15.86 31.167,15.888 32.47,15.888 33.8,17.218 v1(33.8,18.3) ; v1(101.5,33.95) 102.45,33 DD1.38@103.45,33
  Layer 2 w0.3: v1(33.8,18.3) 33.8,20.7 41.7,28.6 93.109,28.6 98.459,33.95 v1(101.5,33.95)
EXT_COM2: DD1.39 DD16.12 | length 88
  Top Layer w0.3: DD16.12@28.5,14.59 28.598,14.688 32.353,14.688 35.1,17.436 v1(35.1,20.9) ; DD1.39@103.45,32.5 104.5,32.5 v1(104.9,32.9)
  Layer 2 w0.3: v1(35.1,20.9) 42.35,28.15 93.498,28.15 98.648,33.3 103.7,33.3 104.1,32.9 v1(104.9,32.9)
EXT_COM3: DD1.40 DD16.11 | length 85.4
  Top Layer w0.3: DD16.11@28.5,13.32 32.207,13.32 36,17.113 v1(36,20.9) ; v1(101.5,32.65) 102.15,32 DD1.40@103.45,32
  Layer 2 w0.3: v1(36,20.9) 42.8,27.7 93.896,27.7 98.846,32.65 v1(101.5,32.65)
EXT_DIG_MOD: DD1.36 DD16.14 | length 84.1
  Top Layer w0.3: DD16.14@28.5,17.13 31.63,17.13 v1(32.8,18.3) ; v1(101.5,34.9) 102.4,34 DD1.36@103.45,34
  Layer 2 w0.3: v1(32.8,18.3) 32.8,20.7 41.15,29.05 92.75,29.05 98.6,34.9 v1(101.5,34.9)
EXT_FLAG1: DD1.41 R83.2 | length 85.1
  Top Layer w0.3: DD1.41@103.45,31.5 104.4,31.5 v1(104.9,32)
  Layer 2 w0.3: v1(31.7,16.488) 33.022,16.488 42.133,25.6 92.848,25.6 99.248,32 v1(104.9,32)
  Bottom Layer w0.3: R83.2@30.075,19.2 30.867,19.2 31.7,18.367 v1(31.7,16.488)
EXT_FLAG2: DD1.42 R84.2 | length 80.8
  Top Layer w0.3: v1(101.5,31.4) 101.5,31.376 101.876,31 DD1.42@103.45,31
  Layer 2 w0.3: v1(31.7,15.288) 32.953,15.288 42.814,25.15 93.348,25.15 99.548,31.35 101.45,31.35 v1(101.5,31.4)
  Bottom Layer w0.3: R84.2@30.075,16.7 30.075,16.65 30.35,16.375 30.617,16.375 v1@31.704,15.288
EXT_FLAG3: DD1.43 R85.2 | length 83.5
  Top Layer w0.3: DD1.43@103.45,30.5 104.4,30.5 v1(104.9,31)
  Layer 2 w0.3: v1(31.7,14.088) 32.975,14.088 43.587,24.7 93.828,24.7 99.778,30.65 103.638,30.65 103.98,30.992 v1@104.867,30.992
  Bottom Layer w0.3: R85.2@30.075,14.1 30.087,14.088 v1(31.7,14.088)
EXT_FLAG4: DD1.44 R86.2 | length 81
  Top Layer w0.3: v1(101.5,29.5) 101.608,29.5 102.108,30 DD1.44@103.45,30
  Layer 2 w0.3: v1(31.7,11.6) 44.35,24.25 94.298,24.25 99.548,29.5 v1(101.5,29.5)
  Bottom Layer w0.3: R86.2@30.075,11.6 v1(31.7,11.6)
EXT_IL1: DD1.32 R76.2 U5.16 | length 87.4
  Top Layer w0.3: U5.16@26.92,54 R76.2@28.95,54 28.975,53.975 28.975,53.025 v1(29,53) ; DD1.32@103.45,36 104.719,36 104.819,36.1 v1(104.9,36.1)
  Layer 2 w0.3: v1(29,53) 40.9,41.1 95.635,41.1 100.035,36.7 104.3,36.7 v1(104.9,36.1)
EXT_IL2: DD1.33 R78.2 U5.14 | length 83.7
  Top Layer w0.3: U5.14@26.9,51.48 R78.2@28.93,51.48 ; R78.2@28.95,51.5 28.975,51.475 28.975,50.525 v1(29,50.5) ; v1(98.7,37) 100.2,35.5 DD1.33@103.45,35.5
  Layer 2 w0.3: v1(29,50.5) 38.9,40.6 95.1,40.6 v1(98.7,37)
EXT_KEY: DD1.34 R79.2 U5.12 | length 85.8
  Top Layer w0.3: U5.12@26.9,48.94 28.91,48.94 R79.2@28.95,48.9 ; R79.2@28.95,48.94 28.975,48.915 28.975,47.965 v1(29,47.94) ; DD1.34@103.45,35 104.551,35 v1(104.9,35.35) v1(104.9,35.35)
  Layer 2 w0.3: v1(29,47.94) 36.84,40.1 94.6,40.1 98.569,36.131 103.653,36.131 104.435,35.35 v1(104.9,35.35)
EXT_MP_EN: DD1.35 R80.2 U5.10 | length 84.9
  Top Layer w0.3: U5.10@26.9,46.4 R80.2@28.95,46.4 28.975,46.375 28.975,45.425 v1(29,45.4) ; DD1.35@103.45,34.5 v1(104.9,34.5)
  Layer 2 w0.3: v1(29,45.4) 34.8,39.6 94.1,39.6 98.15,35.55 103.104,35.55 104.154,34.5 v1(104.9,34.5)
EXT_PMO: DD1.45 DD17.2 | length 84.4
  Top Layer w0.3: DD17.2@26.8,23.2 36,23.2 38.2,21 v1(43.3,21) ; DD1.45@103.45,29.5 104.4,29.5 v1(104.9,30)
  Layer 2 w0.3: v1(43.3,21) 47.084,21 49.884,23.8 98.7,23.8 v1(104.9,30)
FIBER_IL: DD1.5 DD8.4 | length 35.3
  Top Layer w0.3: DD8.4@111.15,10.95 111.15,11.275 111.275,11.4 112.2,11.4 v1(119.1,18.3) ; v1(114.8,32.7) 114.8,32.781 114.975,32.956 DD1.5@114.975,40.525
  Layer 1 w0.3: v1(114.8,32.7) 114.8,31.495 119.1,27.195 v1(119.1,18.3)
FLAG1_HW: R90.2 U7.15 XP9.19 | length 18.5
  Bottom Layer w0.3: XP9.19@3.6,20.5 5.05,19.05 18.55,19.05 18.875,18.725 R90.2@18.875,17.94 U7.15@20.6,17.94
FLAG2_HW: R91.2 U7.13 XP9.22 | length 20.4
  Bottom Layer w0.3: XP9.22@1.6,18.5 2.6,17.5 4.6,17.5 5.682,16.418 18.128,16.418 18.6,15.946 18.6,15.675 R91.2@18.875,15.4 U7.13@20.6,15.4
FLAG3_HW: R93.2 U7.11 XP9.23 | length 19
  Bottom Layer w0.3: XP9.23@3.6,16.5 5.996,14.104 18.396,14.104 18.875,13.625 R93.2@18.875,12.86 U7.11@20.6,12.86 ; U7.11@20.585,13.02 U7.11@20.625,12.98
FLAG4_HW: R94.2 U7.9 XP9.24 | length 21.8
  Bottom Layer w0.3: XP9.24@1.6,16.5 6.9,11.2 18.467,11.2 18.643,11.024 18.643,10.552 R94.2@18.875,10.32 U7.9@20.6,10.32
GND: C2.2 C4.2 C5.2 C6.2 C8.1 C9.1 C10.1 C12.2 C14.2 C15.2 C16.2 C17.2 C18.2 C19.2 C20.2 C21.2 C22.2 C31.2 C33.2 C34.2 C38A6.2 C38A7.2 C40A6.2 C40A7.2 C51.2 C52.2 C53.2 C55.2 C56.2 C57.2 C58.2 C59.2 C60.2 C61.2 C62.2 C63.2 C64.2 C65.2 C66.2 C67.2 C68.2 C69.2 C70.2 C71.2 C72.2 C73.2 C74.2 C75.2 C76.2 C77.2 C85.2 C86.2 C89.2 DA1.7 DA2.2 DA2.3 DA2.5 DA2.6 DA2.7 DA11.5 DA12.5 DA13.2 DD1.10 DD1.27 DD1.74 DD1.99 DD2.4 DD3.3 DD4.9 DD4.15 DD5.2 DD5.3 DD5.8 DD6A6.3 DD6A7.3 DD7A6.2 DD7A6.8 DD7A7.2 DD7A7.8 DD8.3 DD9.3 DD10.3 DD11.2 DD12.3 DD13.1 DD13.7 DD13.10 DD13.16 DD13.23 DD13.25 DD13.26 DD13.27 DD13.28 DD13.46 DD15.4 DD16.9 DD16.15 DD17.4 GB1.1 R1.1 R2.1 R3.2 R4.2 R31.2 R34.1 R35.1 R51.1 U2.2 U3.2 U4.2 U5.9 U5.11 U5.13 U5.15 U7.2 U7.4 U7.6 U7.8 VD1.2 VD2.2 XP3.3 XP8.2 ZQ1.2 ZQ1.4 ZQ3.2 ZQ3.4 | length 189.7
  Top Layer w0.3: DD16.15@28.5,18.4 30.45,18.4 C86.2@30.6,18.25 ; 58,24.25 58.12,24.13 DD7A7.2@58.12,22.3 ; 87.3,38.9 87.3,39.218 87.943,39.861 87.943,40.125 C58.2@88.218,40.4 88.218,40.45 88.493,40.725 88.899,40.725 89.075,40.901 C59.2@89.075,41.825 ; DD7A6.2@88.051,22.3 DD7A6.2@88.051,23.15 ; C5.2@96.365,43.05 97.865,43.05 R2.1@98.065,42.85 ; DD1.27@103.45,38.5 104.551,38.5 104.927,38.876 104.927,39.124 104.151,39.9 103.951,39.9 ; XP8.2@110.2,2.3 C55.2@110.2,5.5 ; ZQ1.2@111,48.2 111.05,48.25 C18.2@111.05,49.8 ; v1(112,44.1) 112,44.181 112.325,44.506 112.325,45.025 C21.2@112.6,45.3 112.6,46.8 ZQ1.4@112.7,46.9 ; DD1.10@112.475,40.525 112.475,39.374 112.8,39.049 ; C19.2@115.7,46.95 115.7,47.55 ; C20.2@115.7,48.3 115.7,47.55 ; 115.758,27.126 116.475,26.409 DD1.74@116.475,25.475 116.475,24.225 ; 116.85,47.55 115.7,47.55 ; 116.962,37.912 117.55,38.5 DD1.99@118.5,38.5 ; 117.775,21.975 117.775,22.675 C14.2@118,22.9 ; C51.2@120.55,21.1 R31.2@120.55,15.9 120.55,12.621 120.85,12.321 121.637,12.321 DA12.5@121.65,12.307 ; 120.559,17.55 DA11.5@121.65,17.55 ; 137.97,21.16 138.035,21.225 138.035,23.485 C31.2@138.1,23.55 DD3.3@139.6,23.55 ; 145.59,21.16 145.724,21.294 ; C33.2@145.724,23.393 C33.2@145.858,23.527 145.822,23.564 145.822,25.413 C34.2@145.785,25.45 ; DA2.7@163.6,23.4 164.35,23.4 164.826,23.4 cw(c164.826,22.376) 165.275,23.296 C4.2@165.6,23.1 ; DD13.28@165.2,38.7 DD13.27@165.2,39.2 DD13.26@165.2,39.7 DD13.25@165.2,40.2 ; ZQ3.4@170.975,46.7 171.425,47.15 171.425,47.375 172.225,48.175 172.225,48.45 172.525,48.75 C67.2@174.375,48.75 175.937,48.75 R51.1@175.975,48.712 ; 171.5,34.7 DD13.1@173.3,34.7 ; 171.9,39.2 DD13.10@173.3,39.2 ; C69.2@172.6,50.7 172.6,48.975 ZQ3.2@172.675,48.9
  Top Layer w0.5: R1.1@84.735,50.9 88.1,50.9 ; 88.356,37.544 88.356,36.677 DD10.3@88.381,36.652 ; DA2.6@163.6,22.1 DA2.7@163.6,23.4
  Layer 2 w0.5: v1(39,17.9) v1(40.3,17.9) v1(41.5,17.9) v1(42.7,17.9) v1(43.9,17.9) v1(45.1,17.9) v1(46.3,17.9) v1(47.5,17.9) v1(48.7,17.9) v1(50,17.9) v1(51.3,17.9) v1(52.5,17.9) v1(53.7,17.9) v1(55,17.9) v1(56.2,17.9) v1(57.3,17.9) v1(58.5,17.9) v1(59.7,17.9) v1(60.9,17.9) v1(62.2,17.9) v1(63.5,17.9) v1(64.7,17.9) v1(65.8,17.9) v1(67,17.9) v1(68.5,17.9) v1(69.7,17.9) v1(70.9,17.9) v1(72.1,17.9) v1(73.3,17.9) v1(74.6,17.9) v1(75.7,17.9) v1(76.8,17.9) v1(77.9,17.9) v1(80.1,17.9) v1(81.3,17.9) v1(82.5,17.9) v1(83.7,17.9) v1(85,17.9) v1(86.2,17.9) v1(87.4,17.9) v1(88.6,17.9) v1(90,17.9) v1(91.4,17.9) v1(93.15,17.9) v1@94.927,17.9 ; v1(94.9,17.9) 94.919,17.881 95.592,17.881 96.173,17.3 v1(96.2,17.3) 96.181,17.319 v1(97.3,16.2) v1(98.357,15.143) v1(99.7,13.8) v1(102.1,13.8) v1(104.6,13.8) v1(106.6,13.8) v1(108.8,13.8) v1(111,13.8) v1(112.9,13.8) v1(115.9,13.8) v1(118.1,13.8) v1(120.1,13.8) v1(127.7,13.8) v1(129.4,15.5) v1(131.3,17.4) v1(132.4,18.5) v1(134.2,18.5)
  Bottom Layer w0.3: 25.64,12.8 25.64,10.66 25.976,10.324 U7.8@26.816,10.324 ; DD5.2@137.92,20.01 137.92,18.376 138.096,18.2 139.19,18.2 ; DD5.3@139.19,20.01 139.19,18.2 ; DD5.8@145.54,20.01 145.54,18.376 145.364,18.2 139.19,18.2 ; DA13.2@184.3,27.225 184.312,27.212 185.588,27.212 v1(185.6,27.2)
  Bottom Layer w0.5: C38A7.2@55.3,21.45 55.475,21.625 55.576,21.625 56.266,22.314
  Bottom Layer w1: C2.2@183.4,4.76 DA1.7@185.9,4.76
  other v1: 104.7,0.4 106.4,0.4 108.1,0.4 109.8,0.4 112.3,0.4 113.8,0.4 115.2,0.4 116.7,0.4 118.2,0.4 125.2,0.5 127.7,0.5 104.7,1.6 112.3,1.6 113.8,1.6 115.2,1.6 116.7,1.6 118.2,1.6 125.2,1.9 127.7,1.9 104.7,3 112.4,3 113.8,3 115.2,3 116.7,3 118.2,3 125.2,3.2 127.7,3.2 104.7,4.5 106.4,4.5 112.4,4.5 113.8,4.5 115.2,4.5 116.7,4.5 118.2,4.5 127.7,4.6 104.7,5.9 106.4,5.9 112.4,5.9 113.8,5.9 115.2,5.9 127.7,6.1 104.7,7.3 106.4,7.3 112.4,7.3 113.8,7.3 115.2,7.3 127.7,7.4 26.2,8 27.7,8 29.3,8 104.7,8.75 106.4,8.75 112.4,8.75 113.8,8.75 115.2,8.75 127.7,8.75 112.9,11.1 115.9,11.1 118.1,11.1 127.7,11.1 104.6,11.2 106.5,11.2 102.2,11.3 126,16.1 127.7,16.2 126,16.9 127.7,17.6 79.016,17.883 129.7,18.6 61.7,20.5 66.8,20.5 68.2,20.5 91.4,20.5 95.1,20.5 96.6,20.5 98,20.5 32.2,21.3 91.4,21.6 95.1,21.6 96.6,21.6 31.4,22.5 33.1,22.5 103.7,23 33.1,23.9 100.4,23.9 102.4,23.9 32.1,24.9 125,26.4 125,27.2 99.3,27.5 100.4,27.5 26.1,28 31.4,28.2 26.1,29.5 31.4,30.7 26.1,31 113.1,31.7 164.7,31.7 166.5,31.7 177.3,31.7 174.9,31.8 26.1,32.5 165.5,32.7 173.6,32.9 175.8,32.9 31.4,33.3 26.1,34 113,34.3 182.5,35.2 26.1,35.5 167.3,35.6 169.1,35.6 170.8,35.6 31.3,36 177.6,36.6 124.8,36.7 127.1,36.7 129.4,36.7 131.6,36.7 133.8,36.7 136.2,36.7 182.5,36.7 167.3,37.3 169.1,37.3 170.8,37.3 177.6,38.3 141.1,38.7 182.5,38.7 189.1,38.7 31.3,38.8 122.3,39 124.1,39 126.1,39 128.3,39 130.4,39 132.5,39 134.7,39 167.3,39 169.1,39 170.8,39 140.1,39.8 182.5,40.3 189.1,40.5 139,41 31.3,41.5 137.9,42.2 187,42.5 189.1,42.5 182.5,43.3 86.2,43.6 94.7,43.7 184.6,44.2 187,44.2 87.1,44.5 89.5,44.6 90.3,44.6 182.5,46.1 184.6,46.1 187,46.1 86,48.8 87.4,48.8 86,50.2 87.4,50.2 88.8,50.2 174.4,50.7 87.4,51.5 88.8,51.5 90.2,51.5 91.5,51.5 92.9,51.5 121.7,52.4 123.5,52.4 125.3,52.4 127.1,52.4 129,52.4 131,52.4 133,52.4 135.1,52.4 87.4,54 88.8,54 90.2,54 91.5,54 92.8,54 94.2,54
GND_24V: C1.2 C32.2 C39A6.2 C39A7.2 C90.2 DA1.1 DA5.1 DA7A6.1 DA7A7.1 DA16.1 U2.3 U3.3 U4.3 XP2.2 | length 282
  Top Layer w0.3: U4.3@145.4,47.2 v1(145.4,48.6) ; U3.3@148.7,47.2 v1(148.7,48.6) ; U2.3@152,47.2 v1(152,48.6)
  Layer 2 w1: DA16.1@31.38,2.6 31.38,8.324 35.011,11.955 58.532,11.955 60.787,9.7 64.5,9.7 67.151,12.351 87.914,12.351 90.565,9.7 94.5,9.7 97.174,12.374 150.893,12.374 150.893,21.893 157.1,28.1 ; v1(145.4,48.6) v1(148.7,48.6) v1(152,48.6) 153.8,48.6 157.2,45.2 157.2,28 172.009,28 180.009,20 DA1.1@185.9,20
  Bottom Layer w0.3: C90.2@31.38,5.58 C90.2@31.8,6
  Bottom Layer w1: DA16.1@31.38,2.6 C90.2@31.38,5.58 ; C39A7.2@59.5,14 61.6,14 62.6,13 DA7A7.1@62.6,9.7 ; C39A6.2@89.41,14 91.7,14 92.5,13.2 DA7A6.1@92.5,9.7 ; DA5.1@152.8,9.7 152.8,13.1 153.4,13.7 C32.2@156.3,13.7 172.857,13.7 179.157,20 188.8,20 C1.2@188.9,20.1 189.4,19.6 XP2.2@195.1,19.6
GND_DRVA6: C41A6.2 C43A6.2 C44A6.2 C45A6.1 C46A6.2 C48A6.2 C49A6.2 DA6A6.5 DA7A6.3 DA9A6.2 DA10A6.5 DD7A6.9 DD7A6.15 R22A6.2 R24A6.2 U1A6.1 XP5A6.2 | length 46.9
  Top Layer w0.3: DA6A6.5@72.45,6.85 72.556,6.956 73.256,6.956 74.477,8.177 74.477,8.586 R24A6.2@74.741,8.85 74.741,9.741 75.3,10.3 77.3,10.3 77.641,9.959 R22A6.2@77.641,8.85 ; C48A6.2@87.941,8.85 C44A6.2@87.941,10.35 87.996,10.405 87.996,12.695 DD7A6.15@88.051,12.75
  Layer 2 w1: XP5A6.2@76.641,1.65 75.641,1.65 74.3,2.99 v1(74.3,6.1) 74.3,7.2 76.8,9.7 v1(79.1,9.7) 79.1,8.4 81.6,5.9 v1@85.8,5.9 ; v1(85.9,5.9) 87.18,4.62 DA7A6.3@92.685,4.62
  Bottom Layer w0.3: DA9A6.2@71.1,5 71.1,5.075 C49A6.2@71.1,6.667
  Bottom Layer w1: C43A6.2@89.41,5.2 89.91,4.7 90.515,4.7 90.596,4.62 DA7A6.3@92.5,4.62
  other v1: 73.2,0.5 68.7,0.7 85.7,1.2 87.6,1.2 68.65,1.877 71.1,2 85.7,2.9 87.6,2.9 84.4,7.2 74.3,7.3 86.8,8.7 67.8,9.5 67.8,10.9 86.8,10.9 78.9,13.5